# EAGLE board ChargerBase (EAGLE 7.2.0)
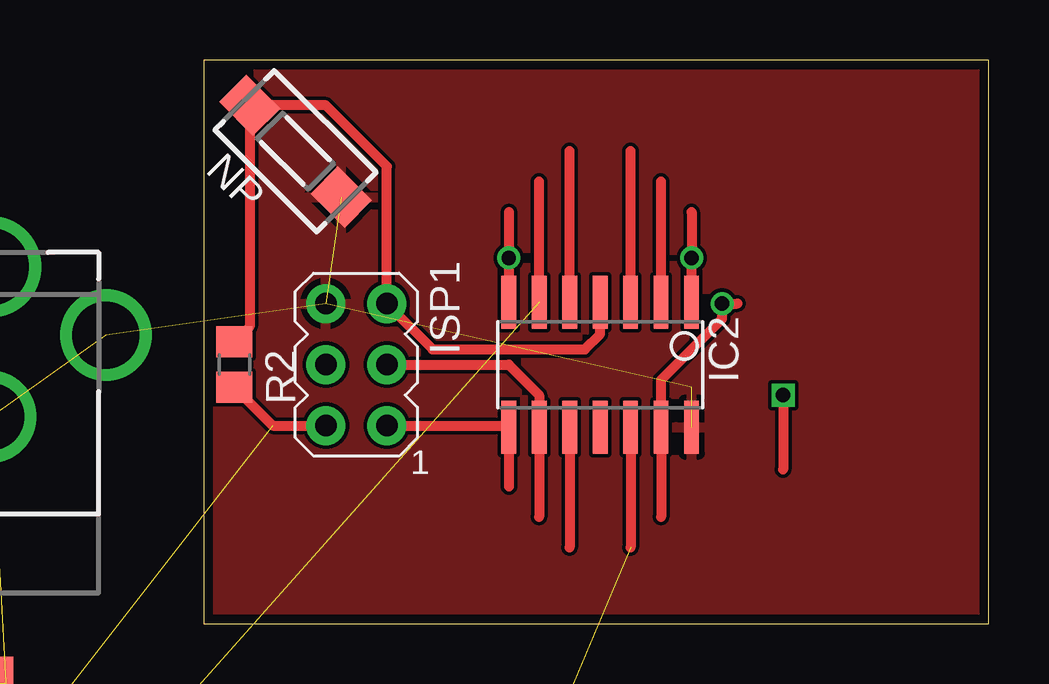
[diagram p0: board, top side]
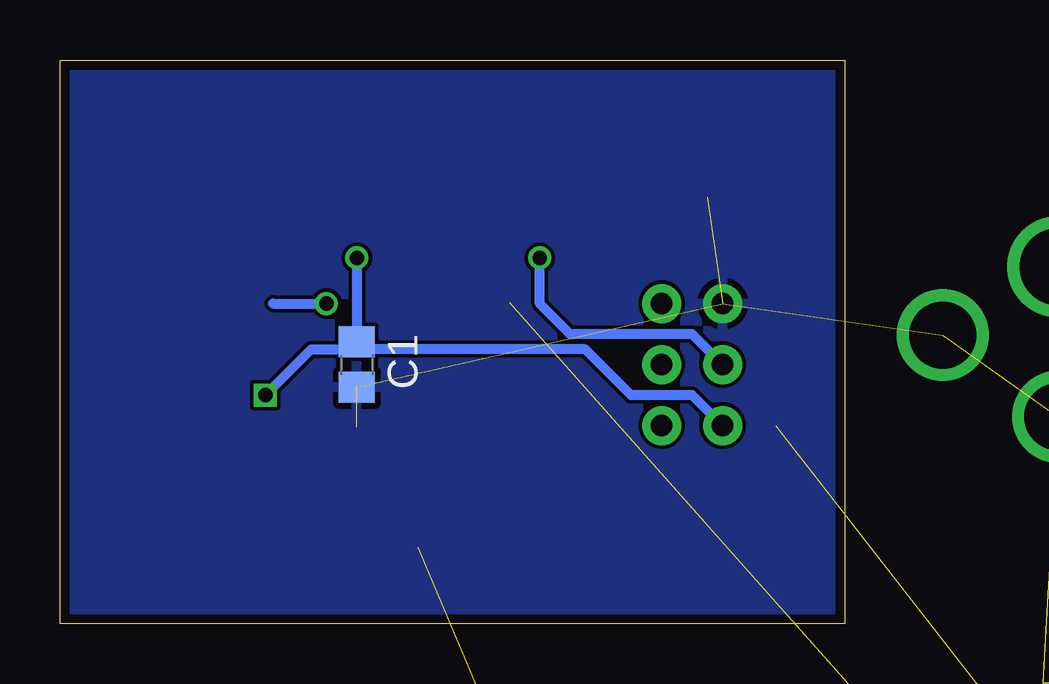
[diagram p1: board, bottom side, seen from below]

Size 32.69 x 23.48 mm. Coordinates in mm from the lower left corner, seen from the top.
Outline: 0,0 32.69,0 32.69,23.48 0,23.48 0,0
Copper layers (1*16): Top 0.0356mm / dielectric 1.5011mm / Bottom 0.0356mm
Design rules "OSHParkDRC": minimum track width 6mil, minimum drill 13mil, track to track 6mil, track to pad 6mil, pad to pad 6mil, via to via 6mil, smd to smd 6mil, copper to edge 15mil, drill to drill 6mil, minimum pad ring 7mil, minimum via ring 7mil, stop-mask expansion 3mil, vias tented up to drill 0mil, thermal gap 10mil

## Footprints (pad centres in the part's own frame; a part is rotated, then mirrored left to right if it is on the bottom)
DCJACK_2MM_PTH = drill 2.8: GND 0,7.35; GNDBREAK 4.8,10.75 | drill 3.2: PWR 0,13.6
C0805 = smd 1.3 x 1.5: 1 -0.95,0; 2 0.95,0
C025-040X050 = drill 0.813 pad 1.422 octagon: 1 -1.27,0; 2 1.27,0
C050-025X075 = drill 0.813 octagon: 1 -2.54,0; 2 2.54,0
DO41-10 = drill 1.118 pad 1.93: A 5.08,0; C -5.08,0
FUSE = drill 1.321 long: 1 -11.43,0; 2 11.43,0
SO08 = smd 0.6 x 2.2: 1 -1.905,-2.6; 2 -0.635,-2.6; 3 0.635,-2.6; 4 1.905,-2.6; 5 1.905,2.6; 6 0.635,2.6; 7 -0.635,2.6; 8 -1.905,2.6
SOIC14 = smd 0.61 x 2.21: 1 -3.81,-2.603; 2 -2.54,-2.603; 3 -1.27,-2.603; 4 0,-2.603; 5 1.27,-2.603; 6 2.54,-2.603; 7 3.81,-2.603; 8 3.81,2.603; 9 2.54,2.603; 10 1.27,2.603; 11 0,2.603; 12 -1.27,2.603; 13 -2.54,2.603; 14 -3.81,2.603
AVRISP = drill 0.9 pad 1.626: 1 -1.27,2.54; 2 1.27,2.54; 3 -1.27,0; 4 1.27,0; 5 -1.27,-2.54; 6 1.27,-2.54
0207/7 = drill 0.813 octagon: 1 -3.81,0; 2 3.81,0
CHIPLED_0805 = smd 1.2 x 1.2: A 0,-1.05; C 0,1.05
DTSM-3 = smd 2 x 1.6: 1 -2.7,0; 2 2.7,0
TO92 = drill 0.813 octagon: 1 1.27,0; 2 0,1.905; 3 -1.27,0
R0805 = smd 1.3 x 1.5: 1 -0.95,0; 2 0.95,0
CT10-G1 = smd 2 x 1.3: 1 -7.62,0; 2 7.62,0
22-23-2021 = drill 1 long: 1 -1.27,0; 2 1.27,0
SOP08 = smd 0.6 x 2.2: 1 -1.905,-2.6; 2 -0.635,-2.6; 3 0.635,-2.6; 4 1.905,-2.6; 5 1.905,2.6; 6 0.635,2.6; 7 -0.635,2.6; 8 -1.905,2.6

## Placement (x,y rotation side)
BARREL_JACK_2.1MM  [DCJACK_2MM_PTH]  -8.89,1.27 0 top  (outside the outline)
C1  100n  [C0805]  20.32,10.79 270 bottom
C2  [C025-040X050]  -12.7,-17.78 0 top  (outside the outline)
C3  1nF  [C0805]  -30.48,-97.79 0 top  (outside the outline)
C4  1nF  [C0805]  -30.48,-92.71 0 top  (outside the outline)
C5  1nF  [C0805]  -30.48,-102.87 0 top  (outside the outline)
C6  1nF  [C0805]  -30.48,-107.95 0 top  (outside the outline)
C7  [C050-025X075]  -60.96,-226.06 0 top  (outside the outline)
C8  [C050-025X075]  -60.96,-231.14 0 top  (outside the outline)
C9  1nF  [C0805]  -68.58,-236.22 0 top  (outside the outline)
D1  1N4004  [DO41-10]  -58.42,-210.82 0 top  (outside the outline)
D2  1N4004  [DO41-10]  -58.42,-218.44 0 top  (outside the outline)
F1  2A  [FUSE]  -1.27,-26.67 0 top  (outside the outline)
IC1  NE5532D  [SO08]  -20.32,-27.94 0 top  (outside the outline)
IC2  TINY24/44/84-SSU  [SOIC14]  16.51,10.79 180 top
IC3  NE5532D  [SO08]  -29.21,-27.94 0 top  (outside the outline)
ISP1  AVRISP-6  [AVRISP]  6.35,10.79 180 top
L1  47uH  [0207/7]  -10.16,-12.7 0 top  (outside the outline)
LED1  [CHIPLED_0805]  -36.83,-115.57 0 top  (outside the outline)
LED2  [CHIPLED_0805]  -43.18,-115.57 0 top  (outside the outline)
LED3  [CHIPLED_0805]  -49.53,-115.57 0 top  (outside the outline)
LED4  [CHIPLED_0805]  -55.88,-115.57 0 top  (outside the outline)
LED5  [CHIPLED_0805]  -62.23,-115.57 0 top  (outside the outline)
NP  RST  [DTSM-3]  3.81,19.68 315 top
Q1  2N3906  [TO92]  -62.23,-156.21 0 top  (outside the outline)
Q2  2N3906  [TO92]  -62.23,-161.29 0 top  (outside the outline)
Q3  2N3906  [TO92]  -62.23,-166.37 0 top  (outside the outline)
R1  1k  [R0805]  -30.48,-35.56 0 top  (outside the outline)
R2  10K  [R0805]  1.27,10.79 270 top
R3  1k  [R0805]  -30.48,-41.91 0 top  (outside the outline)
R4  1k  [R0805]  -30.48,-48.26 0 top  (outside the outline)
R5  1k  [R0805]  -30.48,-54.61 0 top  (outside the outline)
R6  1k  [R0805]  -30.48,-60.96 0 top  (outside the outline)
R7  1k  [R0805]  -30.48,-67.31 0 top  (outside the outline)
R8  1k  [R0805]  -30.48,-73.66 0 top  (outside the outline)
R9  1k  [R0805]  -30.48,-80.01 0 top  (outside the outline)
R10  470  [R0805]  -62.23,-121.92 0 top  (outside the outline)
R11  1R  [R0805]  -62.23,-171.45 0 top  (outside the outline)
R12  1R  [R0805]  -62.23,-177.8 0 top  (outside the outline)
R13  1R  [R0805]  -62.23,-184.15 0 top  (outside the outline)
R14  1R  [R0805]  -62.23,-190.5 0 top  (outside the outline)
R15  1R  [R0805]  -62.23,-196.85 0 top  (outside the outline)
R16  1R  [R0805]  -62.23,-203.2 0 top  (outside the outline)
S1  REED-SWITCH-CT10-1530-G1  [CT10-G1]  -24.13,-114.3 0 top  (outside the outline)
S2  REED-SWITCH-CT10-1530-G1  [CT10-G1]  -55.88,-133.35 0 top  (outside the outline)
T1  2N3904  [TO92]  -62.23,-128.27 0 top  (outside the outline)
T2  2N3904  [TO92]  -62.23,-140.97 0 top  (outside the outline)
T3  2N3904  [TO92]  -62.23,-146.05 0 top  (outside the outline)
T4  2N3904  [TO92]  -62.23,-151.13 0 top  (outside the outline)
TX_COIL  22-23-2021  [22-23-2021]  -68.58,-226.06 0 top  (outside the outline)
U$1  AP1509  [SOP08]  -10.16,-5.08 0 top  (outside the outline)

## Library data of the parts
BARREL_JACK_2.1MM C2 C7 C8 D1 D2 ISP1 = adafruit
C1 C3-C6 C9 L1 R1-R16 = rcl
F1 = special
IC1 IC3 = linear
IC2 = avr-5
LED1-LED5 = led
NP = switch-tact
Q1-Q3 = transistor-pnp
S1 S2 = switch-reed; MF: COTO TECHNOLOGY; MPN: CT10-1530-G1; OC_FARNELL: 1081696
T1-T4 = transistor
TX_COIL = con-molex; MF: MOLEX; MPN: 22-23-2021; OC_FARNELL: 1462926; OC_NEWARK: 25C3832
U$1 = _VMS

## Nets
COIL_DRIVER: C6.2 C9.1 IC3.7 R6.1
GND: BARREL_JACK_2.1MM.GND BARREL_JACK_2.1MM.GNDBREAK C1.2 C2.2 C8.2 IC1.2 IC1.6 IC2.14 IC3.2 ISP1.6 NP.2 Q1.1 Q2.1 Q3.1 S2.2 T1.3 TX_COIL.2 U$1.4 U$1.5 U$1.6 U$1.7 U$1.8
MISO: IC2.8 ISP1.1
MOSI: IC2.7 ISP1.4
N$1: C3.1 IC1.3 R1.1 R3.2
N$2: L1.1 U$1.2
N$3: IC2.2
N$4: IC2.3
N$5: IC2.5
N$6: R11.2 T2.3
N$7: BARREL_JACK_2.1MM.PWR F1.1
N$8: IC1.1 R3.1 R7.2
N$9: C4.1 IC1.5 R4.2 R7.1
N$10: C4.2 IC1.7 R4.1 R8.2
N$11: C5.1 IC3.3 R5.2 R8.1
N$12: C5.2 IC3.1 R5.1 R9.2
N$13: C6.1 IC3.5 R6.2 R9.1
N$15: R12.2 T3.3
N$16: R10.1
N$17: LED1.C LED2.A
N$18: LED2.C LED3.A
N$19: LED3.C LED4.A
N$20: LED4.C LED5.A
N$21: LED5.C R10.2
N$22: S1.2 S2.1
N$23: R13.2 T4.3
N$24: Q1.3 R14.1
N$25: Q2.3 R15.1
N$26: Q3.3 R16.1
N$27: C7.1 R11.1 R12.1 R13.1 R14.2 R15.2 R16.2
N$28: C9.2 D1.A T2.2 T3.2 T4.2
N$29: D1.C D2.A
N$30: C7.2 C8.1 TX_COIL.1
N$31: D2.C Q1.2 Q2.2 Q3.2
PIN10: IC2.10
PIN11: IC2.11
PIN12: IC2.12 S1.1
PIN13: IC2.13
PWM: IC2.6 R1.2
RST: IC2.4 ISP1.5 NP.1 R2.1
SCK: IC2.9 ISP1.3
V+: IC1.8 IC3.8
V-: IC1.4 IC3.4
VCC: C1.1 C2.1 IC2.1 ISP1.2 L1.2 R2.2 U$1.3
VDD: F1.2 LED1.A T2.1 T3.1 T4.1 U$1.1

## Tracks (layer width: path | path; a pad name or v marks a point on that pad's centre or on a via)
COIL_DRIVER  (3 unrouted)
GND  (21 unrouted)
  pour Top: 0,22.86 0,0 32.38,0 32.38,23.5 0,23.5
  pour Bottom: 33.02,0 0,0 0,20.32 0,22.86 33.02,22.86
MISO
  Top 0.406: ISP1.1 12.7,8.26 IC2.8 12.7,5.71
MOSI  (via drill 0.6)
  Top 0.406: IC2.7 v12.7,15.24 12.7,17.14
  Bottom 0.406: ISP1.4 6.35,12.06 11.43,12.06 12.7,13.34 v12.7,15.24
N$1  (3 unrouted)
N$2  (1 unrouted)
N$3
  Top 0.406: IC2.2 19.05,18.41
N$4
  Top 0.406: IC2.3 17.78,19.68
N$5
  Top 0.406: IC2.5 15.24,19.68
N$6  (1 unrouted)
N$7  (1 unrouted)
N$8  (2 unrouted)
N$9  (3 unrouted)
N$10  (3 unrouted)
N$11  (3 unrouted)
N$12  (3 unrouted)
N$13  (3 unrouted)
N$15  (1 unrouted)
N$17  (1 unrouted)
N$18  (1 unrouted)
N$19  (1 unrouted)
N$20  (1 unrouted)
N$21  (1 unrouted)
N$22  (1 unrouted)
N$23  (1 unrouted)
N$24  (1 unrouted)
N$25  (1 unrouted)
N$26  (1 unrouted)
N$27  (6 unrouted)
N$28  (4 unrouted)
N$29  (1 unrouted)
N$30  (2 unrouted)
N$31  (3 unrouted)
PIN10
  Top 0.406: IC2.10 15.24,3.17
PIN12  (1 unrouted)
  Top 0.406: IC2.12 17.78,3.17
PIN13  (via drill 0.6)
  Top 0.406: 19.05,4.45 IC2.13 19.05,10.16 21.59,12.7 v21.59,13.34 22.23,13.34
  Bottom 0.406: 23.81,13.34 v21.59,13.34
PWM  (1 unrouted)
  Top 0.406: IC2.6 13.97,18.41
RST
  Top 0.406: IC2.4 16.51,12.06 15.88,11.43 9.53,11.43 ISP1.5 7.62,19.05 5.08,21.59 NP.1 1.9,12.38 R2.1 1.75,12.22
SCK
  Top 0.406: ISP1.3 12.7,10.79 13.97,9.53 IC2.9 13.97,4.45
V+  (1 unrouted)
V-  (1 unrouted)
VCC  (via drill 0.6)  (3 unrouted)
  Top 0.406: 20.32,17.14 v20.32,15.24 | IC2.1 v20.32,15.24 | 24.16,9.49 v24.13,9.53 24.13,6.42 | v20.32,15.24 20.36,15.2 | R2.2 2.86,8.26 ISP1.2
  Bottom 0.406: ISP1.2 6.35,9.53 8.89,9.53 10.79,11.43 20.32,11.43 C1.1 | v20.32,15.24 C1.1 | v24.13,9.53 22.23,11.43 20.64,11.43 C1.1
VDD  (5 unrouted)